# Altium PCB APCB_DONGHO.PcbDoc
Units mil, origin at the board's own origin, x right, y up, seen from the top; angles counter-clockwise.
Board outline 9275.03 x 2888.03 mil, 2 copper layers (Top Layer, Bottom Layer); 74 components, 65 nets, 278 pads, 96 vias.
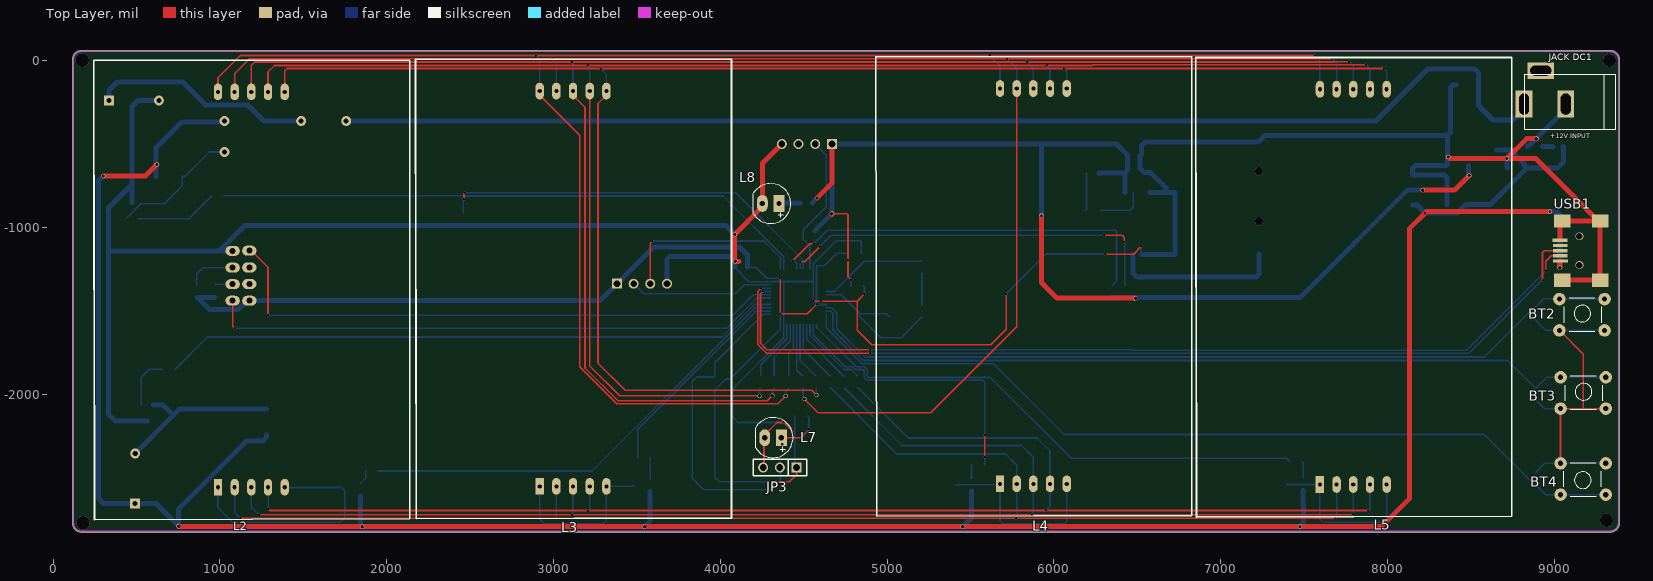
[diagram p0: Top Layer view]
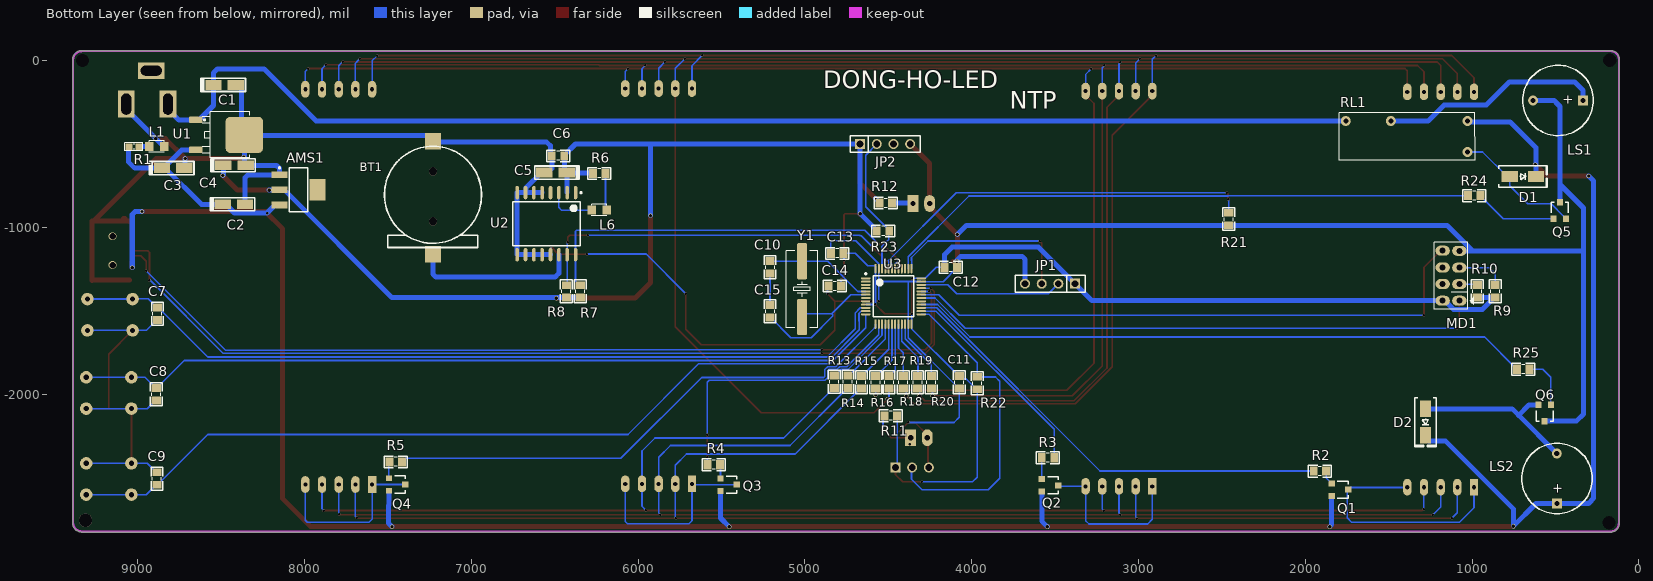
[diagram p1: Bottom Layer view, seen from below]
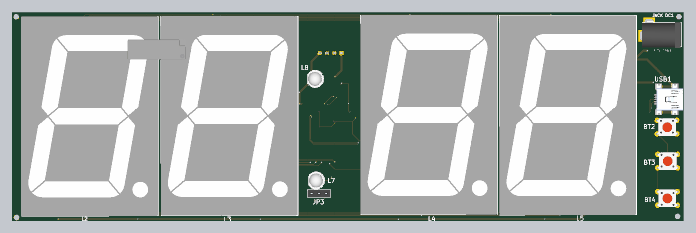
[diagram p2: 3D render of the assembled board from above, using the file's embedded part models]
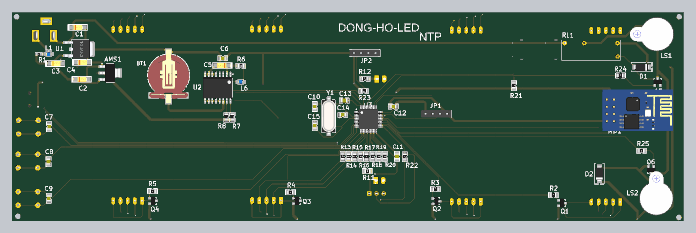
[diagram p3: 3D render of the assembled board from below, using the file's embedded part models]

## Layer stack, top to bottom
Top Solder: solder mask 0.4, Solder Resist, Dk 3.5
Top Layer: signal copper 1.4
Dielectric 1: dielectric 12.6, FR-4, Dk 4.8
Bottom Layer: signal copper 1.4
Bottom Solder: solder mask 0.4, Solder Resist, Dk 3.5

## Board outline
115.98,-2773 ccw(c171,-2773) 171,-2828.01 9333.91,-2828.01 ccw(c9333.91,-2821.46) 9338.19,-2826.43 ccw(c9336,-2771.46) 9391.01,-2771.46 9391.01,4 ccw(c9336,4) 9391.01,4.77 ccw(c9386,5) 9391.01,5 ccw(c9336,5) 9336,60.01 ccw(c9336,55) 9335.52,59.99 ccw(c9335,54) 9335,60.01 169,60.01 ccw(c169,7) 115.98,7

## Design rules (kind name [scope] priority, off if disabled: settings)
Clearance Clearance_POLYGON [IsPolygon] p1: gap=30 ignorepadtopadclearanceinfootprint=TRUE
Clearance [All] p2: gap=7 ignorepadtopadclearanceinfootprint=FALSE
PolygonConnect [All] p1: connectstyle=Relief reliefconductorwidth=10 reliefentries=4 polygonreliefangle="90 Angle" airgapwidth=10
RoutingVias [All] p1: holewidth=28 width=30 viastyle="Through Hole" minholewidth=15 minwidth=15 maxholewidth=20 maxwidth=25
SolderMaskExpansion SolderMaskExpansion_via [isvia] p1: expansion=4 istentingtop=TRUE
SolderMaskExpansion [All] p2: expansion=4 istentingtop=FALSE
Width [All] p1: maxlimit=30 minlimit=8 preferedwidth=10
30 further rules are at their usual default settings.

## Classes and differential pairs
component class "LED 7 THANH": L2 L3 L4 L5 Q1 Q2 Q3 Q4 R2 R3 R4 R5
component class HEADRE: AMS1 C1 C2 C3 C4 "JACK DC1" L1 R1 U1
component class ESP8266: MD1 R9 R10
component class DS3231: BT1 C5 C6 L6 R6 R7 R8 U2
component class SCH_DONGHO: BT2 BT3 BT4 C7 C8 C9 C10 C11 C12 C13 C14 C15 D1 D2 JP1 JP2 JP3 L7 L8 LS1 LS2 Q5 Q6 R11 R12 R13 R14 R15 R16 R17 R18 R19 R20 R21 R22 R23 R24 R25 RL1 U3 USB1 Y1

## Components (designator, comment, footprint, x,y, rotation, side; value= is the part's Value field where it differs from the comment)
AMS1 "AMS1117-3.3V" SOT223 8035.83,-775.45 r270 bottom value="AMS1117-3.3V SOT223"
BT1 "CR1220 SMD" "DE PIN CR1220" 7230,-822 r180 bottom
BT2 "Nut Nhan 4 Chan Cam 6x6" "Nut Nhan 4 Chan Cam 6x6" 9044,-1422 r0 top
BT3 "Nut Nhan 4 Chan Cam 6x6" "Nut Nhan 4 Chan Cam 6x6" 9051,-1891 r0 top
BT4 "Nut Nhan 4 Chan Cam 6x6" "Nut Nhan 4 Chan Cam 6x6" 9296,-2611 r180 top
C1 "10uF" "tu tantalum smd3216" 8479.07,-146 r180 bottom
C2 "1uF" "tu tantalum smd3216" 8424,-862 r180 bottom
C3 "10uF" "tu tantalum smd3216" 8787.93,-645 r180 bottom
C4 "10uF" "tu tantalum smd3216" 8420,-628 r180 bottom
C5 "10uF" "tu tantalum smd3216" 6495,-672 r0 bottom
C6 "104" "tu 0805" 6480,-572 r0 bottom
C7 "104" "tu 0805" 8882,-1517.77 r90 bottom
C8 "104" "tu 0805" 8889,-2000 r90 bottom
C9 "104" "tu 0805" 8885,-2506 r270 bottom
C10 "22nF" "tu 0805" 5208.87,-1238.43 r270 bottom
C11 "104" "tu 0805" 4074,-1928 r270 bottom
C12 "104" "tu 0805" 4126,-1239 r180 bottom
C13 "104" "tu 0805" 4805,-1156 r0 bottom
C14 "104" "tu 0805" 4821,-1352 r0 bottom
C15 "22nF" "tu 0805" 5208.87,-1503.77 r90 bottom
D1 "M7" "DIODE SMA" 695.26,-695 r180 bottom
D2 "M7" "DIODE SMA" 1278,-2167 r270 bottom
"JACK DC1" "JACK DC 5.5" "JACK DC 5.5" 8944,-161 r180 top value="Jac DC"
JP1 "JP 1x4 2.54" "JP 1x4 CT" 3380,-1338 r0 bottom
JP2 "JP 1x4 2.54" "JP 1x4 CT" 4669,-500 r180 bottom
JP3 "JP 1x3 2.54" "JP 1x3 CT" 4457,-2440 r180 top
L1 "LED 0805" LED-0805-Blue 8931,-516 r180 bottom
L2 "LED 7 Thanh" LED7SEG_2.3inch 1148,-1523.08 r0 top
L3 "LED 7 Thanh" LED7SEG_2.3inch 3077,-1518 r0 top
L4 "LED 7 Thanh" LED7SEG_2.3inch 5837,-1503 r0 top
L5 "LED 7 Thanh" LED7SEG_2.3inch 7755,-1507 r0 top
L6 "LED 0805" LED-0805-Blue 6188.39,-897 r0 bottom
L7 "LED 5mm" LED-5MM-RED 4366,-2261 r180 top
L8 "LED 5mm" LED-5MM-RED 4352,-857 r180 top
LS1 "Coi Chip Speaker" "Coi Chip Speacker" 334,-239 r0 bottom
LS2 "Coi Chip Speaker" "Coi Chip Speacker" 491,-2656 r90 bottom
MD1 "ESP8266 Module" "ESP2866 Module" 1076,-1440 r90 bottom
Q1 "HF" SOT23 1792,-2573 r270 bottom value=C9014
Q2 "HF" SOT23 3530,-2547 r270 bottom value=C9014
Q3 "HF" SOT23 5457.21,-2543 r270 bottom value=C9014
Q4 "HF" SOT23 7445,-2542 r270 bottom value=C9014
Q5 "HF" SOT23 473,-899.21 r180 bottom value=C9014
Q6 "HF" SOT23 564.6,-2113.21 r0 bottom value=C9014
R1 "220R" "tro smd 0603" 9023,-517 r0 bottom
R2 "100R" "tro smd 0805" 1912,-2459 r180 bottom
R3 "100R" "tro smd 0805" 3542.43,-2384.39 r0 bottom
R4 "100R" "tro smd 0805" 5545.57,-2420.61 r180 bottom
R5 "100R" "Tro SMD 0805" 7452.23,-2409.39 r0 bottom
R6 "470R" "Tro SMD 0805" 6232.23,-679.39 r0 bottom
R7 "4.7k" "tro smd 0805" 6345,-1384.23 r270 bottom
R8 "4.7k" "tro smd 0805" 6427.61,-1384.23 r270 bottom
R9 "10k" "tro smd 0805" 971.39,-1383.57 r90 bottom
R10 "10k" "tro smd 0805" 864,-1383 r90 bottom
R11 "470R" "Tro SMD 0805" 4484,-2133 r0 bottom
R12 "470R" "Tro SMD 0805" 4516,-852 r180 bottom
R13 "100R" "tro smd 0805" 4826,-1926 r90 bottom
R14 "100R" "tro smd 0805" 4744,-1927 r90 bottom
R15 "100R" "tro smd 0805" 4663,-1928.1 r90 bottom
R16 "100R" "tro smd 0805" 4573,-1928.1 r270 bottom
R17 "100R" "tro smd 0805" 4498,-1928.1 r90 bottom
R18 "100R" "tro smd 0805" 4407.61,-1928.1 r270 bottom
R19 "100R" "tro smd 0805" 4322,-1928.1 r270 bottom
R20 "100R" "tro smd 0805" 4239,-1928.1 r270 bottom
R21 "10k" "tro smd 0805" 2456,-950 r270 bottom
R22 "4.7k" "tro smd 0805" 3964.61,-1933.43 r270 bottom
R23 "4.7k" "tro smd 0805" 4531.23,-1024.39 r0 bottom
R24 "100R" "tro smd 0805" 985.77,-807.61 r180 bottom
R25 "100R" "tro smd 0805" 694,-1849 r180 bottom
RL1 "RelayHF46" "Relay 4 chan HF46F" 1027,-362.96 r180 bottom
U1 "78M05 SMD TO252" TO252 8506.67,-446 r270 bottom
U2 "DS3231 SMD" "SOIC 16" 6550,-978.02 r270 bottom
U3 "STM32F103xx_LQFP48" STM32_LQPF48 4468.33,-1413.79 r180 bottom
USB1 "USB Mini 5p SMD" "USB Mini 5p SMD" 9172,-1137 r270 top
Y1 "16Mhz" "Thach Anh 2 chan SMD" 5016.5,-1370.59 r90 bottom value=4Mhz

## Footprints (in the part's own frame and the unit in brackets; to place one, negate y for a bottom-side part, rotate by r counter-clockwise, add the part's x,y. Pads: shape width x height; smd on the part's side, far side on the other; paste and mask are expansions set on the pad)
"Coi Chip Speacker" [mm]
  rect 1.5x1.5 hole 0.8: 1(0,0)
  round 1.5 hole 0.8: 2(7.62,0.013)
  silkscreen extent -1.55,-5.38 9.18,5.36, body extent -2.22,-6 13.24,6, height 4.5
"DE PIN CR1220" [mm]
  rect 2.5x2.5 smd: 1(0,-8.6) 2(0,8.6)
  silkscreen extent -7.39,-7.6 7.4,7.84, body extent -7.39,-9.42 7.36,9.38, height 4.27
"DIODE SMA" [mm] "SMA"
  rect 2.5x1.7 smd: 1(-2,0) 2(2,0)
  silkscreen extent -3.68,-1.65 3.75,1.65, body extent -2.6,-1.37 2.6,1.37, height 2.4
"ESP2866 Module" [mil]
  oval 60x86 hole 36: 1(0,0) 2(99,0) 3(198,0) 4(299,0) 5(0,100) 6(100,100) 7(199.5,100) 8(300,100)
  silkscreen extent -51,-86 350,149, body extent -137,-817 433,159, height 381
"JACK DC 5.5" [mil] "Jac DC input"
  rect 100x160 hole 59.06 slot 125.98 at 90 deg: 1(125,100) 2(-125,100)
  rect 160x100 hole 59.06 slot 125.98 at 0 deg: 3(25,-100)
  silkscreen extent -425,-80 120,250, body extent -410,-105 134,269, height 434
"JP 1x3 CT" [mm]
  rect 1.52x1.52 hole 1.02: 1(0,0)
  round 1.52 hole 1.02: 2(2.54,0) 3(5.08,0)
  silkscreen extent -1.52,-1.27 6.6,1.27, body extent -1.52,-1.25 6.6,1.25, height 8.51
"JP 1x4 CT" [mm]
  rect 1.52x1.52 hole 1.02: 1(0,0)
  round 1.52 hole 1.02: 2(2.54,0) 3(5.08,0) 4(7.62,0)
  silkscreen extent -1.52,-1.27 9.14,1.27, body extent -1.52,-1.25 9.14,1.25, height 8.51
LED7SEG_2.3inch [mil] "Dán"
  rect 50x100 hole 25: 1(-160,-1035)
  oval 50x100 hole 25: 2(-60,-1035) 3(40,-1035) 4(140,-1035) 5(240,-1035) 6(240,1335.08) 7(140,1335.08) 8(40,1335.08) 9(-60,1335.08) 10(-160,1335.08)
  silkscreen extent -905,-1230 990,1525, body extent -905,-1228 985,1528, height 480
LED-5MM-RED [mil] "LED 2 PIN, 5 ly , Only colour,pin to pin 100mil"
  rect 65x100 hole 32: 1(0,0)
  oval 65x100 hole 32: 2(100,0)
  silkscreen extent -70,-120 154,120, body extent -65,-119 149,118, height 339
LED-0805-Blue [mil]
  rect 50x55 smd: 1(0,0) 2(90,0)
  silkscreen extent 0,-35 90,35, body extent 5,-25 85,25, height 43
"Nut Nhan 4 Chan Cam 6x6" [mil] "SW button 4pin, 250 x250 mil"
  round 75 hole 31: 1(-13,-8) 1(258,-8) 2(-13,-196) 2(258,-196)
  silkscreen extent 15,-215 240,0, body extent -31,-225 281,19, height 276
"Relay 4 chan HF46F" [mil]
  round 60 hole 30: 1(0,0) 2(0,-185.04) 3(-460,0) 4(-730,0)
  silkscreen extent -770,-235 46,50, body extent -763,-228 40,48, height 154
"SOIC 16" [mm] "SOIC, 16-Leads, Body 10.30x7.50mm, Pitch 1.27mm, IPC Medium Density"
  oval 2.032x0.55 smd: 1(-4.725,4.445) 2(-4.725,3.175) 3(-4.725,1.905) 4(-4.725,0.635) 5(-4.725,-0.635) 6(-4.725,-1.905) 7(-4.725,-3.175) 8(-4.725,-4.445) 9(4.725,-4.445) 10(4.725,-3.175) 11(4.725,-1.905) 12(4.725,-0.635) 13(4.725,0.635) 14(4.725,1.905) 15(4.725,3.175) 16(4.725,4.445)
  silkscreen extent -4.85,-5.15 3.35,5.39, body extent -5.15,-5.17 5.16,5.16, height 2.48
SOT23 [mm] "SOT23"
  rect 0.9x0.95 smd: 1(-0.95,-1.25) 2(0,1.25)
  rect 0.9x0.95 smd mask+0: 3(0.95,-1.25)
  silkscreen extent -1.3,-0.38 1.3,1.25, body extent -1.52,-1.23 1.48,1.27, height 1.06
SOT223 [mm]
  rect 1x2.4 smd: 1(-2.3,-2.9) 2(0,-2.9) 3(2.3,-2.9)
  rect 3.3x2.4 smd: 4(0,2.9)
  silkscreen extent -3.47,-3.03 3.35,1.4, body extent -3.25,-3.56 3.25,3.4, height 1.68
STM32_LQPF48 [mm]
  oval 1.45x0.3 smd: 1(-4.225,2.75) 2(-4.225,2.25) 3(-4.225,1.75) 4(-4.225,1.25) 5(-4.225,0.75) 6(-4.225,0.25) 7(-4.225,-0.25) 8(-4.225,-0.75) 9(-4.225,-1.25) 10(-4.225,-1.75) 11(-4.225,-2.25) 12(-4.225,-2.75) 25(4.225,-2.75) 26(4.225,-2.25) 27(4.225,-1.75) 28(4.225,-1.25) 29(4.225,-0.75) 30(4.225,-0.25) 31(4.225,0.25) 32(4.225,0.75) 33(4.225,1.25) 34(4.225,1.75) 35(4.225,2.25) 36(4.225,2.75)
  oval 0.3x1.45 smd: 13(-2.75,-4.225) 14(-2.25,-4.225) 15(-1.75,-4.225) 16(-1.25,-4.225) 17(-0.75,-4.225) 18(-0.25,-4.225) 19(0.25,-4.225) 20(0.75,-4.225) 21(1.25,-4.225) 22(1.75,-4.225) 23(2.25,-4.225) 24(2.75,-4.225) 37(2.75,4.225) 38(2.25,4.225) 39(1.75,4.225) 40(1.25,4.225) 41(0.75,4.225) 42(0.25,4.225) 43(-0.25,4.225) 44(-0.75,4.225) 45(-1.25,4.225) 46(-1.75,4.225) 47(-2.25,4.225) 48(-2.75,4.225)
  silkscreen extent -4.35,-3.1 3.1,3.57, body extent -4.5,-4.5 4.5,4.5, height 1.6
"Thach Anh 2 chan SMD" [mm] "SMD Crystal HC49/US-SM package"
  round 0.508 on Mech15: 0(0,0)
  rrect25% 5.5x1.5 smd: 1(-4.25,0) 2(4.25,0)
  silkscreen extent -5.84,-2.41 5.84,2.41, body extent -6.4,-2.41 6.4,2.42, height 4.29
TO252 [mm] "TO252"
  round 0.5 on Mech15: 0(0,0)
  rrect25% 1x2 smd: 1(-2.285,-3.7) 3(2.285,-3.7)
  rrect25% 5.5x5.7 smd: 2(0,3.7)
  silkscreen extent -3.5,-2.7 3.5,4.5, body extent -3.3,-3.95 3.3,5.76, height 2.31
"tro smd 0603" [mm] "Chip Capacitor, 2-Leads, Body 1,60x0,80mm, IPC Medium Density"
  rect 1x0.95 smd mask+0.076: 1(-0.75,0) 2(0.75,0)
  silkscreen extent -1.35,-0.58 1.37,0.58, body extent -0.82,-0.42 0.82,0.43, height 0.44
"tro smd 0805" [mm]
  rect 1.2x1.4 smd: 1(-0.946,-0.061) 2(0.954,-0.061)
  silkscreen extent -1.75,-0.97 1.75,0.84, body extent -1.56,-0.76 1.44,0.64, height 0.53
"Tro SMD 0805" [mm]
  rect 1.2x1.4 smd: 1(-0.946,-0.061) 2(0.954,-0.061)
  silkscreen extent -1.75,-0.97 1.75,0.84, body extent -1.56,-0.76 1.44,0.64, height 0.53
"tu 0805" [mm] "Compoment SMD 80x50mil"
  rect 1.2x1.4 smd: 1(-0.946,-0.003) 2(0.954,-0.003)
  silkscreen extent -1.75,-0.89 1.75,0.89, body extent -1.01,-0.64 1.01,0.63, height 0.61
"tu tantalum smd3216" [mm]
  rect 2.5x1.5 smd: 1(-1.7,0) 2(1.7,0)
  silkscreen extent -3.61,-1 3.17,1, body extent -1.7,-0.9 1.7,0.9, height 1.69
"USB Mini 5p SMD" [mm]
  rect 0.5x2.25 smd: 1(1.651,-3.429) 2(0.864,-3.442) 3(0.076,-3.454) 4(-0.711,-3.467) 5(-1.499,-3.48)
  rect 2x2.5 smd: 5(-4.424,-3.124) 5(-4.42,2.616) 5(4.576,-3.124) 5(4.58,2.616)
  body extent -5.27,-3.8 5.43,5.4, height 3.95

## Part data
AMS1: library part "AMS1117 SMD", "Dán", Chung_Loai=Dán, Don_Vi=Con, Ma_Hang=MH000596
BT1: library part "De pin CR1220 SMD", Ma_Hang=MH000833, Ten="Đế PIN CR1220 SMD"
BT2 BT3 BT4: "Nut Nhan 4 Chan 6x6mm", Ma_Hang=MH004584, Ten="Nút Nhấn 4 Chân 6x6x5MM DIP"
C1 C3 C4 C5: library part "Tu tantalum 10uF 16V SMD3216", "Dán", Chung_Loai=Dán, Don_Vi=Con, Ma_Hang=MH001954, So_Chan=2, Ten_Linh_Kien="Tụ tantalum 106C-10uF 16V SMD3216"
C2: library part "Tu tantalum 1uF 25V SMD3216", "Dán", Chung_Loai=Dán, Don_Vi=Con, Ma_Hang=MH007472, So_Chan=2, Ten_Linh_Kien="Tụ tantalum 105E-1uF 25V SMD3216"
C6 C7 C8 C9 C11 C12 C13 C14: library part "Tu 0805 104 50V 10%", "Dán", Chung_Loai=Dán, Don_Vi=Con, Ma_Hang=MH004551, So_Chan=2, Ten_Linh_Kien="Tụ 0805 104-100nF 10% 50V"
C10 C15: library part "Tu 0805 22nF 50V 20%", "Dán", Chung_Loai=Dán, Don_Vi=Con, Ma_Hang=MH007857, So_Chan=2, Ten_Linh_Kien="Tụ 0805 22nF 50V 20%"
D1 D2: library part "Diode M7 ( 4007 )", "Dán", Chung_Loai=Dán, Don_Vi=Con, Ma_Hang=MH000944, Ten_Linh_Kien="Diode M7 1N4007 SMD 1A 1000V"
JP1 JP2: library part "JP 1x4 2.54 Cai Thang", "Cắm", Chung_Loai=Cắm, Don_Vi=Con, Ma_Hang=MH004006, Ten_Linh_Kien="Jump Đơn Cái 2.54MM 1x20P Thẳng"
JP3: library part "JP 1x3 2.54 Cai Thang", "Cắm", Chung_Loai=Cắm, Don_Vi=Con, Ma_Hang=MH004006, Ten_Linh_Kien="Jump Đơn Cái 2.54MM 1x20P Thẳng"
L1 L6: library part "LED 0805 Xanh Duong", "Dán", Chung_Loai=Dán, Don_Vi=Con, Ma_Hang=MH002327, Ten_Linh_Kien="LED 0805 Màu Xanh Dương (Blue)"
L2 L3 L4 L5: library part "LED 7x1 2.3inch Anot", "Dán", Chung_Loai=Dán, Don_Vi=Con, Ma_Hang=MH000901, Ten_Linh_Kien="Led 7 2.3 1 Số Anot (Sáng Đỏ)"
L7 L8: library part "LED 5mm Do", "Cắm", Chung_Loai=Cắm, Don_Vi=Con, Ma_Hang=MH008967, Ten_Linh_Kien="Led 5MM Phủ Đỏ (1000c)"
LS1 LS2: "Còi chip"
Q1 Q2 Q3 Q4 Q5 Q6: library part "C1815 HF SMD", "NPN transistor"
R1: library part "Tro 0603 5% 220R", "Dán", Chung_Loai=Dán, Don_Vi=Con, Ma_Hang=MH006322, So_Chan=2, Ten_Linh_Kien="Trở 0603 5% 220R"
R2 R3 R4 R5 R13 R14 R15 R16 R17 R18 R19 R20 R24 R25: library part "Tro 0805 5% 100R", "Dán", Chung_Loai=Dán, Don_Vi=Con, Ma_Hang=MH005251, So_Chan=2, Ten_Linh_Kien="Trở 0805 5% 100R"
R6 R11 R12: library part "Tro 0805 5% 470R", "Dán", Chung_Loai=Dán, Don_Vi=Con, Ma_Hang=MH005341, So_Chan=2, Ten_Linh_Kien="Trở 0805 5% 470R"
R7 R8 R22 R23: library part "Tro 0805 5% 4.7k", "Dán", Chung_Loai=Dán, Don_Vi=Con, Ma_Hang=MH005307, So_Chan=2, Ten_Linh_Kien="Trở 0805 5% 4.7k"
R9 R10 R21: library part "Tro 0805 5% 10k", "Dán", Chung_Loai=Dán, Don_Vi=Con, Ma_Hang=MH005239, So_Chan=2, Ten_Linh_Kien="Trở 0805 5% 10k"
RL1: library part "Relay 4 chan HF46F", "Relay 4 chan HF46F", Ma_Hang=MH003879, Ten="Relay 5V5A HF46F-G 5-HS1"
U1: "Dán", Chung_Loai=Dán, Don_Vi=Con, Ma_Hang=MH001917, Ten_Linh_Kien="78M05 TO252"
U2: "SOIC"
USB1: "USB Type B", Ma_Hang=MH001022, Ten="MiniUSB 5P SMD"
Y1: library part "Thach Anh 2 chan SMD", "Crystal For all Crystal 2pin."
U3: ComponentLink1Description="Manufacturer Link", ComponentLink1URL=www.st.com/stm32, ComponentLink2Description=Datasheet, ComponentLink2URL=http://www.st.com/stonline/products/literature/ds/13587.pdf, DatasheetVersion="rev6, Mar-2008", PackageDescription="48-Pin Low-Profile Quad Flat Pack, 7 x 7 mm Body, 0.5 mm Pitch (LQFP48)", PackageReference=LQFP48, PackageVersion=Mar-2008, Published=30-May-2008, Publisher="Altium Limited"

## Via types
v1: diameter 15, hole 15, Top Layer to Bottom Layer, tented both sides, 63 vias
v2: diameter 25, hole 20, Top Layer to Bottom Layer, tented both sides, 24 vias
v3: diameter 78.74/50 (per signal layer), hole 78.74, Top Layer to Bottom Layer, 3 vias
v4: diameter 50, hole 50, Top Layer to Bottom Layer, tented both sides, 2 vias
v5: diameter 47.24, hole 39.37, Top Layer to Bottom Layer, tented both sides, 2 vias
v6: diameter 50, hole 28, Top Layer to Bottom Layer, tented both sides, 1 vias
v7: diameter 78.74, hole 78.74, Top Layer to Bottom Layer, 1 vias

## Nets (pads, with @x,y where several pads share a name; then routed paths per layer and width w, separated by ;. In a path a pad name is that pad's centre, name@x,y a point inside that pad or via, vN(x,y) a via of type N, cw(c..) or ccw(c..) an arc to the next point about the centre after c; other vN are vias at no path point)
3.3V: AMS1.2 C4.1 C5.1 C6.1 C11.1 C12.1 C13.1 C14.1 JP1.1 JP2.1 JP3.1 MD1.5 R6.2 R7.2 R8.2 R9.1 R10.1 R11.1 R12.1 R22.2 R23.2 U2.2 U3.9 U3.24 U3.36 U3.48 | length 14592.9
  Top Layer w10: v1(4298,-2526) 4414,-2526 4457,-2483 JP3.1 ; v1@4355,-1305 4355.7,-1305.7 v1(4357,-1305.7) 4357,-1307.06 4360,-1310.06 v1(4360,-1518) 4521.5,-1518 v1(4577,-1462.5) ; v2(4669,-917.87) 4759.14,-917.87 4765,-923.72 4765,-1295 v1(4783,-1313)
  Top Layer w30: v1@4579.03,-825.03 4669,-735.06 JP2.1 ; v2@4669,-922.65 v2(4669,-917.87) ; v2(5926,-930) 5926,-1332 6019,-1425 v2(6490,-1425) ; v2(8212,-777) 8402,-777 v2(8490,-689)
  Bottom Layer w8: C12.1 4212.96,-1239.13 4279.35,-1305.52 U3.36
  Bottom Layer w10: v1(4298,-2526) 3995,-2526 3967,-2498 R22.2 3970.94,-1971 4032.54,-1909.39 4055.51,-1909.39 C11.1 4078.07,-1890.77 4359.71,-1609.13 4359.71,-1580.47 U3.24 ; U3.36 4302.08,-1305.61 4356.91,-1305.61 v1(4357,-1305.7) ; U3.24@4360.03,-1580.1 v1(4360,-1518) ; JP3.1@4432.08,-2464.92 JP3.1 4446.77,-2429.77 R11.1 ; v1@4576.59,-1456.8 4576.59,-1230.65 4577.43,-1229.81 4623.64,-1229.81 4697.59,-1155.87 C13.1 4765,-1158.64 v1(4765,-1196) ; v1@4582.45,-1462.65 4634.32,-1462.65 U3.9 ; v1(4783,-1313) 4783,-1351.09 C14.1
  Bottom Layer w30: R10.1 865.54,-1420.23 R10.1@865.83,-1420.52 ; R9.1 968.71,-1420.52 R10.1@865.83,-1420.52 ; C12.1 4163.23,-1164.23 4118,-1119 3599,-1119 JP1.1 3278,-1440 MD1.5 1162.54,-1440 1110.54,-1492 937.32,-1492 R10.1@865.83,-1420.52 ; R12.1 4553.23,-850.46 4577.69,-826 v1(4578,-826) ; R23.2 4568.8,-1018.06 v2(4669,-917.87) JP2.1 5926,-500 ; v2(5926,-930) 5926,-500 ; R6.2 6272.3,-674.5 C5.1@6425.57,-674.5 ; R7.2 R8.2 ; U2.2 6425,-675.07 C5.1@6425.57,-674.5 ; C5.1 C5.1@6425.57,-674.5 ; R8.2@6430,-1425 6433.2,-1421.8 7476.09,-1421.8 8122.44,-775.45 AMS1.2 8151.55,-777 v2(8212,-777) ; C5.1@6442.77,-657.47 C6.1 6442.77,-567.93 6374.84,-500 5926,-500 ; C4.1 8486.93,-685.93 v2(8490,-689)
+5: AMS1.3 C2.1 C3.1 D1.2 D2.2 LS2.1 Q1.3 Q2.3 Q3.3 Q4.3 R1.2 RL1.1 U1.3 USB1.1 | length 16942.8
  Top Layer w30: v2(301,-692) 552,-692 v2(621,-623) ; v2(752,-2792) 755,-2795 v2(1853,-2795) v2(3546,-2795) v2(5454,-2795) v2(7476,-2795) 7963,-2795 8131,-2627 8131,-1009 8235,-905 v2(8975,-905) ; v2(9033,-1241.33) USB1.1@9033,-1206.33
  Bottom Layer w30: v2(301,-692) 271,-722 271,-2623 284,-2636 284,-2638.43 301.57,-2656 LS2.1 616,-2656 v2(752,-2792) 752,-2687.97 1160.01,-2279.95 1259.54,-2279.95 1278,-2261.49 D2.2 ; D1.2 616.52,-522.48 772,-367 1022.96,-367 RL1.1 ; Q1.3 1841.21,-2783.21 v2(1853,-2795) ; v2(3546,-2795) 3579.21,-2761.79 Q2.3 ; v2(5454,-2795) 5506.43,-2742.57 Q3.3 ; v2(7476,-2795) 7497,-2774 7497,-2667.1 7494.21,-2664.32 Q4.3 ; AMS1.3 8177.56,-866 8225.09,-913.53 8419.72,-913.53 8471.24,-862 C2.1 8618.17,-862 C3.1@8835.17,-645 ; U1.3 8736.71,-535.96 8820.65,-619.9 8820.65,-630.47 C3.1@8835.17,-645 ; v2(8975,-905) 9015.43,-905 9033,-922.57 v2(9033,-1241.33) ; R1.2@9053,-516.53 R1.2 9054,-518.47 9054,-609 9018,-645 C3.1 C3.1@8835.17,-645
  other v1: 8225,-915
+12: "JACK DC1.1" C1.1 RL1.4 U1.1 | length 7489.8
  Bottom Layer w30: RL1.4 7930.04,-362.96 8243,-50 8522,-50 8546,-74 C1.1 8546,-269.39 8632.65,-356.04 U1.1 8753.96,-356.04 8819,-291 8819,-261
BOOT0: R21.1 U3.44 | length 2370.7
  Top Layer w10: v1(2463,-833) 2463,-800 v1(2470,-793)
  Bottom Layer w10: R21.1 2458.39,-838.96 2463,-834.35 v1(2463,-833) ; v1(2470,-793) 4093,-793 4499,-1199 4497.85,-1200.15 U3.44
BT1: BT2.1 C7.2 U3.10 | length 5001.8
  Bottom Layer w10: U3.10 4635.01,-1483.03 4667.64,-1483.03 4698,-1513.39 4698,-1608 4867,-1777 8581.13,-1777 8877.93,-1480.2 C7.2 8885.8,-1480.2 8937,-1429 BT2.1@9044,-1429 ; BT2.1@9035,-1430 BT2.1@9306,-1430
BT2: BT3.1 C8.2 U3.11 | length 4951.7
  Bottom Layer w10: U3.11 4635.01,-1502.72 4663.29,-1502.72 4675.21,-1514.64 4675.21,-1561.79 4674,-1563 4674,-1615 4857,-1798 8720.5,-1798 8884.93,-1962.43 C8.2 8892.8,-1962.43 8956.23,-1899 9038,-1899 BT3.1@9309,-1899
BT3: BT4.1 C9.2 U3.12 | length 5168.7
  Bottom Layer w10: U3.12 4634.66,-1601.66 4851.8,-1818.8 5637.8,-1818.8 6061,-2242 8579.62,-2242 8881.2,-2543.57 C9.2 8889.07,-2543.57 8948.5,-2603 BT4.1@9038,-2603 ; BT4.1@9054.5,-2603 BT4.1@9325.5,-2603
BUZZ: R25.1 U3.28 | length 3731.6
  Bottom Layer w10: R25.1 924.62,-1658 4010.04,-1658 4205.04,-1463 U3.28
"DHT11 DATA": JP2.2 R23.1 U3.46 | length 849.4
  Bottom Layer w10: U3.46 4537.22,-1113.22 4497,-1073 4497,-1015.06 4636,-876.06 4636,-567 JP2.2
GND: "JACK DC1.2" AMS1.1 BT1.2 C1.2 C2.2 C3.2 C4.2 C5.2 C6.2 C11.2 C12.2 C13.2 C14.2 JP1.4 JP2.4 JP3.3 L1.2 L7.2 L8.2 LS1.2 MD1.4 Q5.2 Q6.2 R21.2 U1.2 U2.5 U2.6 U2.7 U2.8 U2.9 U2.10 U2.11 U2.12 U2.13 U3.8 U3.23 U3.35 U3.47 USB1.5 | length 20142.8
  Top Layer w8: v1(6308,-1160) 6479,-1160 v1(6525,-1114)
  Top Layer w10: JP3.3 4261.5,-2435.5 4261.5,-2265.5 L7.2 4266,-2243.5 4339.5,-2170 v1(4380,-2170) 4380.25,-2170 4434,-2223.75 4434,-2224 ; v1(4557,-1443) v1(4601,-1443) 4820,-1443 ; v1(4864,-1399) 4820,-1443 ; v1(5714,-1398) 5714,-1611 5621,-1704 4907,-1704 4820,-1617 4820,-1443
  Top Layer w30: 4113,-1203.5 v2(4089,-1203.5) 4086,-1200.5 v2(4086,-1043) 4252,-877 L8.2 4252,-617 JP2.4 ; v2(8364,-578) 8373,-587 v2(8716,-587) ; v2(8893,-468) 8835,-468 v2(8716,-587) ; USB1.5@9035,-1069.33 9035,-976.83 9049,-962.83 9049.08,-962.92 USB1.5@9265.07,-962.92 ; USB1.5@9049,-1317.17 9049.08,-1317.25 9274.92,-1317.25 9275,-1317.33 9275,-963 9265.16,-963 USB1.5@9265.07,-962.92 ; USB1.5@9075.16,-946 USB1.5@9085,-946 ; v2(8716,-587) 8889.16,-587 USB1.5@9265.07,-962.92
  Bottom Layer w8: C12.2 4088.43,-1243.07 4170.35,-1325 4301.78,-1325 U3.35 ; U2.13 v1(6525,-1114)
  Bottom Layer w10: U3.35 4380,-1325.2 ; v1(4380,-2170) 4106.37,-2170 4074.13,-2137.76 C11.2 4078.07,-1965.57 4096.69,-1946.95 4096.69,-1945.31 4379.74,-1662.26 U3.23 4379.74,-1325.46 4380,-1325.2 ; v1(4557,-1443) 4556.56,-1442.56 4556.56,-1319.35 ; C13.2 4844,-1154.44 4844,-1086.86 4838.14,-1081 4695.08,-1081 4557.26,-1218.83 4557.26,-1247.1 U3.47 4556.56,-1247.79 4556.56,-1319.35 ; C14.2 4864,-1357.29 v1(4864,-1399) ; v1(5714,-1398) 5952,-1160 v1(6308,-1160) ; 4380,-1325.2 4550.7,-1325.2 4556.56,-1319.35
  Bottom Layer w30: Q5.2 473,-743 ; Q6.2 374.43,-2162.43 332,-2120 332,-1149 ; LS1.2 507.57,-239.5 490,-257.07 490,-258 473,-275 473,-743 ; MD1.4 997,-1141 ; JP1.4 3680,-1191.57 3697.57,-1174 4066,-1174 4089,-1197 v2(4089,-1203.5) 4089,-1238.56 C12.2 ; v2(4086,-1043) 4030.57,-987.57 R21.2 1150.43,-987.57 997,-1141 ; U2.13 U2.12 U2.11 U2.10 U2.9 U2.8 U2.7 ; U2.5 U2.6 U2.7 ; C2.2 8357.07,-702.47 8339.5,-684.9 AMS1.1 8150,-646.57 8167.57,-629 8352.07,-629 C4.2 8361,-620.07 U1.2 ; C1.2 8392.46,-146 8377.93,-160.53 8377.93,-429.07 U1.2 ; v2(8716,-587) 8716,-640 C3.2 ; L1.2 8841,-513.5 8851,-503.5 8856.5,-503.5 9069,-291 9069,-261 ; 9062,-256 9062,-226 ; 9072,-258 9091,-277 ; 332,-1149 332,-884 473,-743 ; 332,-1149 340,-1141 997,-1141 ; U2.7 6670.83,-787.83 6670.83,-761.21 6581.61,-672 C5.2 6542.24,-672 6517.57,-647.33 C6.2 6526.2,-563.24 6526.2,-510.8 6548,-489 7224.42,-489 BT1.2 7264.21,-449.2 8357.8,-449.2 U1.2
"IR DATA": JP3.2 R22.1 U3.25 | length 1929.2
  Bottom Layer w10: U3.25 4255.95,-1522.05 3967,-1811 R22.1 3966.2,-1897 3857,-1897 3832,-1922 3832,-2504 3901,-2573 4298,-2573 4361,-2510 JP3.2@4361,-2432
NetBT1_1: BT1.1 U2.14 | length 1003.2
  Bottom Layer w30: U2.14 6475,-1276 6497,-1298 7212.43,-1298 7230,-1280.43 BT1.1
NetBT2_2: BT2.2 BT3.2 BT4.2 C7.1 C8.1 C9.1 | length 2468.8
  Top Layer w10: BT2.2@9031,-1618 9173.5,-1760.5 9173.5,-2087 ; BT4.2@9038,-2415 9038,-2087 9173.5,-2087 ; BT3.2@9309,-2087 9173.5,-2087
  Bottom Layer w10: C9.1 8889.07,-2468.77 8942.84,-2415 BT4.2@9038,-2415 ; C7.1@8885.8,-1555 8947.8,-1617 BT2.2@9044,-1617 ; C8.1 8892.8,-2037.23 8942.57,-2087 9038,-2087 BT3.2@9309,-2087 ; BT2.2@9035,-1618 9302,-1618 BT2.2@9306,-1618 ; BT4.2@9054.5,-2415 BT4.2@9325.5,-2415
NetC10_2: C10.2 C15.2 | length 190.3
  Bottom Layer w10: C15.2 5209,-1465.93 C10.2
NetD1_1: D1.1 Q5.3 RL1.2 | length 790.1
  Bottom Layer w10: Q5.3 435.6,-947.44 448.32,-934.72 449.3,-934.72 525.27,-858.76 665.24,-858.76 774,-750 D1.1 789.75,-695 936.75,-548 RL1.2
NetD2_1: D2.1 LS2.2 Q6.3 | length 1042.1
  Bottom Layer w30: LS2.2 720.75,-2126.75 ; Q6.3 658,-2064 720.75,-2126.75 ; D2.1 759.24,-2088.26 720.75,-2126.75
NetL1_1: L1.1 R1.1 | length 62.9
  Bottom Layer w30: L1.1 8931.5,-516.5 8992.97,-516.5 R1.1
NetL2_1: L2.1 L2.5 Q1.2 | length 1463.3
  Bottom Layer w10: L2.1 988,-2681 1075,-2768 1723,-2768 1749,-2742 1749,-2579.21 Q1.2 1730.07,-2560.28 1390.2,-2560.28 L2.5
NetL2_2: L2.2 L3.2 L4.2 L5.2 R15.1 | length 8794
  Top Layer w10: v1(1122,-2745) v1(5774,-2745) 7682.15,-2745 7684.65,-2742.5 v1(7686,-2742.5)
  Bottom Layer w10: L2.2 1088,-2711 v1(1122,-2745) ; v1(3009,-2746) 3009,-2744.65 3017,-2736.65 L3.2 ; R15.1 4664.54,-1965.33 5058.21,-2359 5710,-2359 5777,-2426 L4.2 5777,-2740.65 5774,-2743.65 v1(5774,-2745) ; v1(7686,-2742.5) 7686,-2741.15 7695,-2732.15 L5.2
NetL2_3: L2.3 L3.3 L4.3 L5.3 R14.1 | length 8753.1
  Top Layer w10: v1(1234,-2723) 7787.65,-2723 7791.65,-2719 v1(7793,-2719)
  Bottom Layer w10: L2.3 1188,-2677 v1(1234,-2723) ; v1(3109,-2724) 3109,-2722.65 3117,-2714.65 L3.3 ; R14.1 4745.54,-1964.23 5089.31,-2308 5806,-2308 5877,-2379 L4.3 5877,-2712.65 5867,-2722.65 v1(5867,-2724) ; v1(7793,-2719) 7793,-2717.65 7795,-2715.65 L5.3
NetL2_4: L2.4 L3.4 L4.4 L5.4 R13.1 | length 8714.7
  Top Layer w10: v1(1290,-2690) 1291.35,-2690 1299.35,-2698 v1(7884,-2698)
  Bottom Layer w10: L2.4 1289.04,-2559.12 1289.04,-2689.04 v1(1290,-2690) ; v1(3208,-2699) 3208,-2697.65 3217,-2688.65 L3.4 ; R13.1 4827.54,-1963.23 5127.31,-2263 5899,-2263 5977,-2341 L4.4 5977,-2673 v1(5954,-2696) ; v1(7884,-2698) 7884,-2696.65 7895,-2685.65 L5.4
NetL2_6: L2.6 L3.6 L4.6 L5.6 R16.2 | length 10204.4
  Top Layer w10: L2.6 1388,-62 1402,-48 v1(7977,-48) ; L3.6 3317,-207.92 3267,-257.92 3267,-1815 3429,-1977 4548,-1977 v2(4576,-2005)
  Bottom Layer w10: v1(3283,-50) 3317,-84 L3.6 ; R16.2 4576,-1966.28 v2(4576,-2005) ; v1(6062,-49) 6062,-50.35 6077,-65.35 L4.6 ; v1(7977,-48) 7995,-66 L5.6
NetL2_7: L2.7 L3.7 L4.7 L5.7 R20.2 | length 9972.7
  Top Layer w10: L2.7 1288,-68 1326.5,-29.5 6231.99,-29.5 6235.49,-26 v1(7872,-26) ; L3.7 3217,-1831 3396.68,-2010.68 v2(4234.69,-2010.68)
  Bottom Layer w10: v1(3204,-28.5) 3204,-29.85 3217,-42.85 L3.7 ; v2(4234.69,-2010.68) 4234.69,-1972.38 R20.2 ; v1(5956,-28.5) 5977,-49.5 L4.7 ; v1(7872,-26) 7895,-49 L5.7
NetL2_8: L2.8 L3.8 L4.8 L5.8 R19.2 | length 10234.8
  Top Layer w10: L2.8 1188,-29.86 1208.86,-9 7677.08,-9 7679.58,-6.5 v1(7772,-6.5) ; L3.8 3117,-207.92 3189,-279.92 3189,-1842.96 3386.04,-2040 4281,-2040 v2(4312,-2009)
  Bottom Layer w10: v1(3108,-10) 3108,-11.35 3117,-20.35 L3.8 ; v2(4312,-2009) 4312,-1978.07 R19.2 ; v1(5839,-8) 5877,-46 L4.8 ; v1(7772,-6.5) 7790.2,-24.7 7790.2,-27.2 7795,-32 L5.8
NetL2_9: L2.9 L3.9 L4.9 L5.9 R17.1 | length 10345.2
  Top Layer w10: L2.9 1088,-78 1176.5,10.5 2991,10.5 2991.5,11 5718.5,11 5719,10.5 5720,11.5 6693.5,11.5 6694.5,10.5 v1(7669,10.5) ; v2(4504,-2029) 4586,-2111 5262,-2111 5777,-1596 L4.9
  Bottom Layer w10: v1(2991,11) 3017,-15 L3.9 ; R17.1 4495.61,-2016.55 4504,-2024.94 v2(4504,-2029) ; v1(5719,11) 5777,-47 L4.9 ; v1(7669,10.5) 7687.2,-7.7 7687.2,-10.2 7695,-18 L5.9
NetL2_10: L2.10 L3.10 L4.10 L5.10 R18.2 | length 10528.5
  Top Layer w10: L2.10 988,-104 1122,30 2893,30 2894,29 2895.5,30.5 7562.5,30.5 v1(7563,30) ; L3.10 2917,-207.92 3157,-447.92 3157,-1835 3379,-2057 4346,-2057 v2(4392,-2011)
  Bottom Layer w10: v1(2894,30) 2917,7 L3.10 ; v2(4392,-2011) 4392,-1983.68 R18.2 ; v1(5615.38,31.39) 5677,-30.23 L4.10 ; v1(7563,30) 7595,-2 L5.10
NetL3_1: L3.1 L3.5 Q2.2 | length 990.2
  Bottom Layer w10: L3.1 2917,-2751 2945,-2779 3297,-2779 3317,-2759 L3.5 3474.79,-2553 Q2.2
NetL4_1: L4.1 L4.5 Q3.2 | length 1130.9
  Bottom Layer w10: Q3.2 5672,-2543 L4.1 5677,-2543 5677,-2759 5695,-2777 6064,-2777 6077,-2764 L4.5
NetL5_1: L5.1 L5.5 Q4.2 | length 1035.1
  Bottom Layer w10: Q4.2 L5.1 7595,-2750 7614,-2769 7983,-2769 7995,-2757 L5.5
NetL6_1: L6.1 R6.1 | length 222.7
  Bottom Layer w10: L6.1 6195,-890.39 R6.1
NetL6_2: L6.2 U2.3 | length 293.9
  Bottom Layer w10: L6.2 6459.57,-897 6476.61,-879.96 6476.61,-793.61 U2.3
NetL7_1: L7.1 R11.2 | length 313.1
  Top Layer w10: v1(4371,-2300) 4371,-2266 L7.1 4483,-2261 v1(4532,-2212)
  Bottom Layer w10: R11.2 4532,-2141.03 v1(4532,-2212)
NetL8_1: L8.1 R12.2 | length 127.5
  Bottom Layer w30: L8.1 4354.61,-854.39 R12.2
NetLS1_1: LS1.1 RL1.3 | length 1330.9
  Bottom Layer w30: LS1.1 334,-180 386,-128 775,-128 914,-267 1167,-267 1262.96,-362.96 RL1.3
NetMD1_1: MD1.1 U3.30 | length 3460.5
  Top Layer w10: MD1.1 1076,-1592.65 1088,-1604.65 v1(1088,-1606)
  Bottom Layer w10: v1(1088,-1606) 4038,-1606 4220.37,-1423.63 U3.30
NetMD1_2: MD1.2 R9.2 | length 109.1
  Bottom Layer w10: R9.2 974,-1341 MD1.2
NetMD1_3: MD1.3 R10.2 | length 297.1
  Bottom Layer w10: R10.2 861.61,-1277.39 897,-1242 MD1.3
NetMD1_8: MD1.8 U3.31 | length 3506
  Top Layer w10: MD1.8 1189,-1140 1288,-1239 v1(1288,-1527)
  Bottom Layer w10: v1(1288,-1527) 4075,-1527 4198.06,-1403.94 U3.31
NetQ1_1: Q1.1 R2.2 | length 88.5
  Bottom Layer w10: Q1.1 1842.2,-2535.6 1874.43,-2503.37 R2.2
NetQ2_1: Q2.1 R3.2 | length 127.9
  Bottom Layer w10: Q2.1 3579.21,-2382.79 R3.2
NetQ3_1: Q3.1 R4.2 | length 83.3
  Bottom Layer w10: Q3.1 5506.43,-2424.57 R4.2
NetQ4_1: Q4.1 R5.2 | length 99.4
  Bottom Layer w10: R5.2 7494.21,-2411.41 Q4.1
NetQ5_1: Q5.1 R24.2 | length 497.4
  Bottom Layer w10: Q5.1 813.71,-948.43 948.2,-813.94 R24.2
NetQ6_1: Q6.1 R25.2 | length 313.5
  Bottom Layer w8: Q6.1 527.2,-1899.8 575.61,-1851.39 R25.2
NetR2_1: R2.1 U3.27 | length 2758.2
  Bottom Layer w10: R2.1 3230.69,-2461.39 4209.08,-1483 4301.67,-1483 U3.27
NetR3_1: R3.1 U3.26 | length 1261.4
  Bottom Layer w10: R3.1 3505.2,-2210.93 4213.76,-1502.37 U3.26
NetR4_1: R4.1 U3.14 | length 1729.9
  Top Layer w10: v1(5585,-2378.5) 5585.5,-2378 5585.5,-2247.5 5585,-2247 v1(5585,-2243.5)
  Bottom Layer w10: U3.14 4556.91,-1643.56 4748.35,-1835 4790.63,-1835 4808.43,-1852.8 4856.14,-1852.8 4863.17,-1859.83 4863.17,-1901.18 4878.98,-1917 5574,-1917 5585,-1928 v1(5585,-2243.5) ; R4.1 5585,-2420.8 v1(5585,-2378.5)
NetR5_1: R5.1 U3.13 | length 3220.4
  Bottom Layer w10: U3.13 4576.59,-1602.27 4577.43,-1603.11 4582.78,-1603.11 4815.47,-1835.8 4863.18,-1835.8 4880.17,-1852.79 4880.17,-1894.14 4886.02,-1900 5619,-1900 6103.44,-2384.44 7396.38,-2384.44 7415,-2403.06 R5.1
NetR7_1: R7.1 U2.16 U3.42 | length 2416.1
  Top Layer w10: v1(4435,-1201) 4537,-1099 v1(4560,-1099)
  Bottom Layer w10: v1(4435,-1201) 4435.96,-1201.96 4441.27,-1201.96 4458.14,-1218.83 4458.14,-1247.1 U3.42 ; v1(4560,-1099) 4641,-1018 4641,-1016.86 6368.14,-1016.86 6375,-1023.72 U2.16 6375,-1323.33 6351.33,-1347 R7.1
NetR8_1: R8.1 U2.15 U3.43 | length 2351.8
  Top Layer w8: v1(4478.35,-1206) 4506,-1206 v1(4595,-1117) ; v1(6301,-1046) 6409,-1046 6423,-1060 v1(6423,-1089)
  Bottom Layer w8: U3.43 4478.26,-1247.36 4478.26,-1206.09 v1(4478.35,-1206) 4480,-1204.35 v1@4480,-1203 ; v1(4595,-1117) 4662,-1050 4667,-1050 4671,-1046 v1(6301,-1046) ; v1(6423,-1089) 6424,-1090 6424,-1163.05 U2.15
  Bottom Layer w10: U2.15 6425,-1342 R8.1
NetR13_2: R13.2 U3.15 | length 453.8
  Bottom Layer w10: U3.15 4537.22,-1647.91 4741.31,-1852 4783.24,-1852 4819.67,-1888.43 R13.2
NetR14_2: R14.2 U3.16 | length 404.4
  Bottom Layer w10: U3.16 4517.54,-1669.29 4737.67,-1889.43 R14.2
NetR15_2: R15.2 U3.17 | length 380.1
  Bottom Layer w10: U3.17 4497.85,-1731.71 4656.67,-1890.53 R15.2
NetR16_1: R16.1 U3.18 | length 353.3
  Bottom Layer w10: U3.18 4478.17,-1797.59 4571.46,-1890.87 R16.1
NetR17_2: R17.2 U3.19 | length 328.1
  Bottom Layer w10: U3.19 4458.48,-1857.34 4491.67,-1890.53 R17.2
NetR18_1: R18.1 U3.20 | length 322.7
  Bottom Layer w10: R18.1 4410,-1752.15 4438.8,-1723.35 U3.20
NetR19_1: R19.1 U3.21 | length 352
  Bottom Layer w10: R19.1 4322,-1888.48 4322,-1780 4419.11,-1682.89 U3.21
NetR20_1: R20.1 U3.22 | length 376.2
  Bottom Layer w10: R20.1 4241.39,-1824.65 4398,-1668.04 4398,-1615 4399.08,-1613.92 4399.08,-1580.47 U3.22
OSC1: C10.1 U3.5 Y1.2 | length 650.2
  Bottom Layer w10: U3.5 4682.27,-1384.26 4862.53,-1204 5015.77,-1204 Y1.2 5206.93,-1203.27 C10.1
OSC2: C15.1 U3.6 Y1.1 | length 933
  Bottom Layer w10: U3.6 4724.7,-1403.94 4838.75,-1518 ; Y1.1 4996.59,-1518 4838.75,-1518 ; C15.1 5204.8,-1541 5084.61,-1661.18 4961.93,-1661.18 4832.9,-1532.14 4832.9,-1523.86 4838.75,-1518
SWDCKL: JP1.3 U3.37 | length 1137.2
  Top Layer w10: JP1.3 3580,-1096.35 3593,-1083.35 v1(3593,-1082)
  Bottom Layer w10: v1(3593,-1082) 4261.96,-1082 4361,-1181.04 4361,-1201.19 4360.06,-1202.13 U3.37
SWDIO: JP1.2 U3.34 | length 869.7
  Bottom Layer w10: JP1.2 3541,-1399 4089,-1399 4143.11,-1344.89 U3.34
SWITCH: R24.1 U3.38 | length 3579.9
  Bottom Layer w10: R24.1 2459.42,-810 2461.92,-812.5 4016.5,-812.5 4379.74,-1175.74 U3.38
USB_DM: U3.32 USB1.2 | length 5445.8
  Top Layer w10: v1(4253,-1384.44) 4253,-1385.8 4241,-1397.8 4241,-1695.96 4278.58,-1733.54 v1(4899.89,-1733.54) ; v1(8950,-1261) 8950,-1203 8982,-1171 USB1.2
  Bottom Layer w10: v1(4253,-1384.44) 4253.09,-1384.35 4301.9,-1384.35 U3.32 ; v1(4899.89,-1733.54) 6464.15,-1733.54 6466.62,-1736 8475.39,-1736 v1@8950.2,-1261.2
USB_DP: U3.33 USB1.3 | length 5589.8
  Top Layer w10: v1(4243.96,-1364.39) 4224,-1384.35 4224,-1703 4276.49,-1755.49 v1(4898.44,-1755.49) ; v1(8930.02,-1316.02) 8930.02,-1150.98 8941,-1140 USB1.3
  Bottom Layer w10: v1(4243.96,-1364.39) 4244.05,-1364.48 4301.9,-1364.48 U3.33 ; v1(4898.44,-1755.49) 8488.51,-1755.49 v1@8929,-1315
pads on no net: "JACK DC1.3" AMS1.4 JP2.3 MD1.6 MD1.7 U1.0 U2.1 U2.4 U3.1 U3.2 U3.3 U3.4 U3.7 U3.29 U3.39 U3.40 U3.41 U3.45 USB1.4 Y1.0
copper on no net:
  other v3: 179,-2771 9331,1 174,2
  other v4: 7229.8,-962.9 7230,-663.5
  other v5: 9150.57,-1226.61 9150.57,-1053.39
  other v6: 9331,1
  other v7: 9313,-2756

## Keep-outs
Keep-Out Layer:
  lines w10: 280,-2823 9333.91,-2823 ccw(c9333.91,-2821.46) 9335.46,-2821.46 ; 309,-2823 171,-2823 cw(c171,-2773) 121,-2773 121,7 cw(c169,7) 169,55 283,55 9335,55 cw(c9335,54) 9336,54 cw(c9336,4) 9386,4 9386,-2771.46 cw(c9336,-2771.46) 9336,-2821.46 cw(c9335.46,-2821.46) 9335.46,-2822 ; 9336,55 cw(c9336,5) 9386,5 ; 19383,4287 cw(c19383,4237) 19433,4237

## Silkscreen, mask and mechanical layers (free items; w line width, h text height)
Top Overlay:
  text "+12V INPUT" at 8975.44,-478.46 h50
Bottom Overlay:
  text "DONG-HO-LED" at 4891.15,-203.07 h180
  text "NTP" at 3771.45,-325 h180

## Text inside footprints (layer, text, board x,y; h text height)
LS1: Bottom Overlay "+" at 389.5,-211 h60 r180
LS2: Bottom Overlay "+" at 463,-2600.5 h60 r270